# Altium PCB Connection_Test - Kopie.PcbDoc
Units mil, origin at the board's own origin, x right, y up, seen from the top; angles counter-clockwise.
Board outline 2960 x 2470 mil, 2 copper layers (Top Layer 1, Bottom Layer 1), stack 20.956 mil thick; 34 components, 216 nets, 180 pads, 636 vias.
Unrouted connection lines stored in the file: 245.
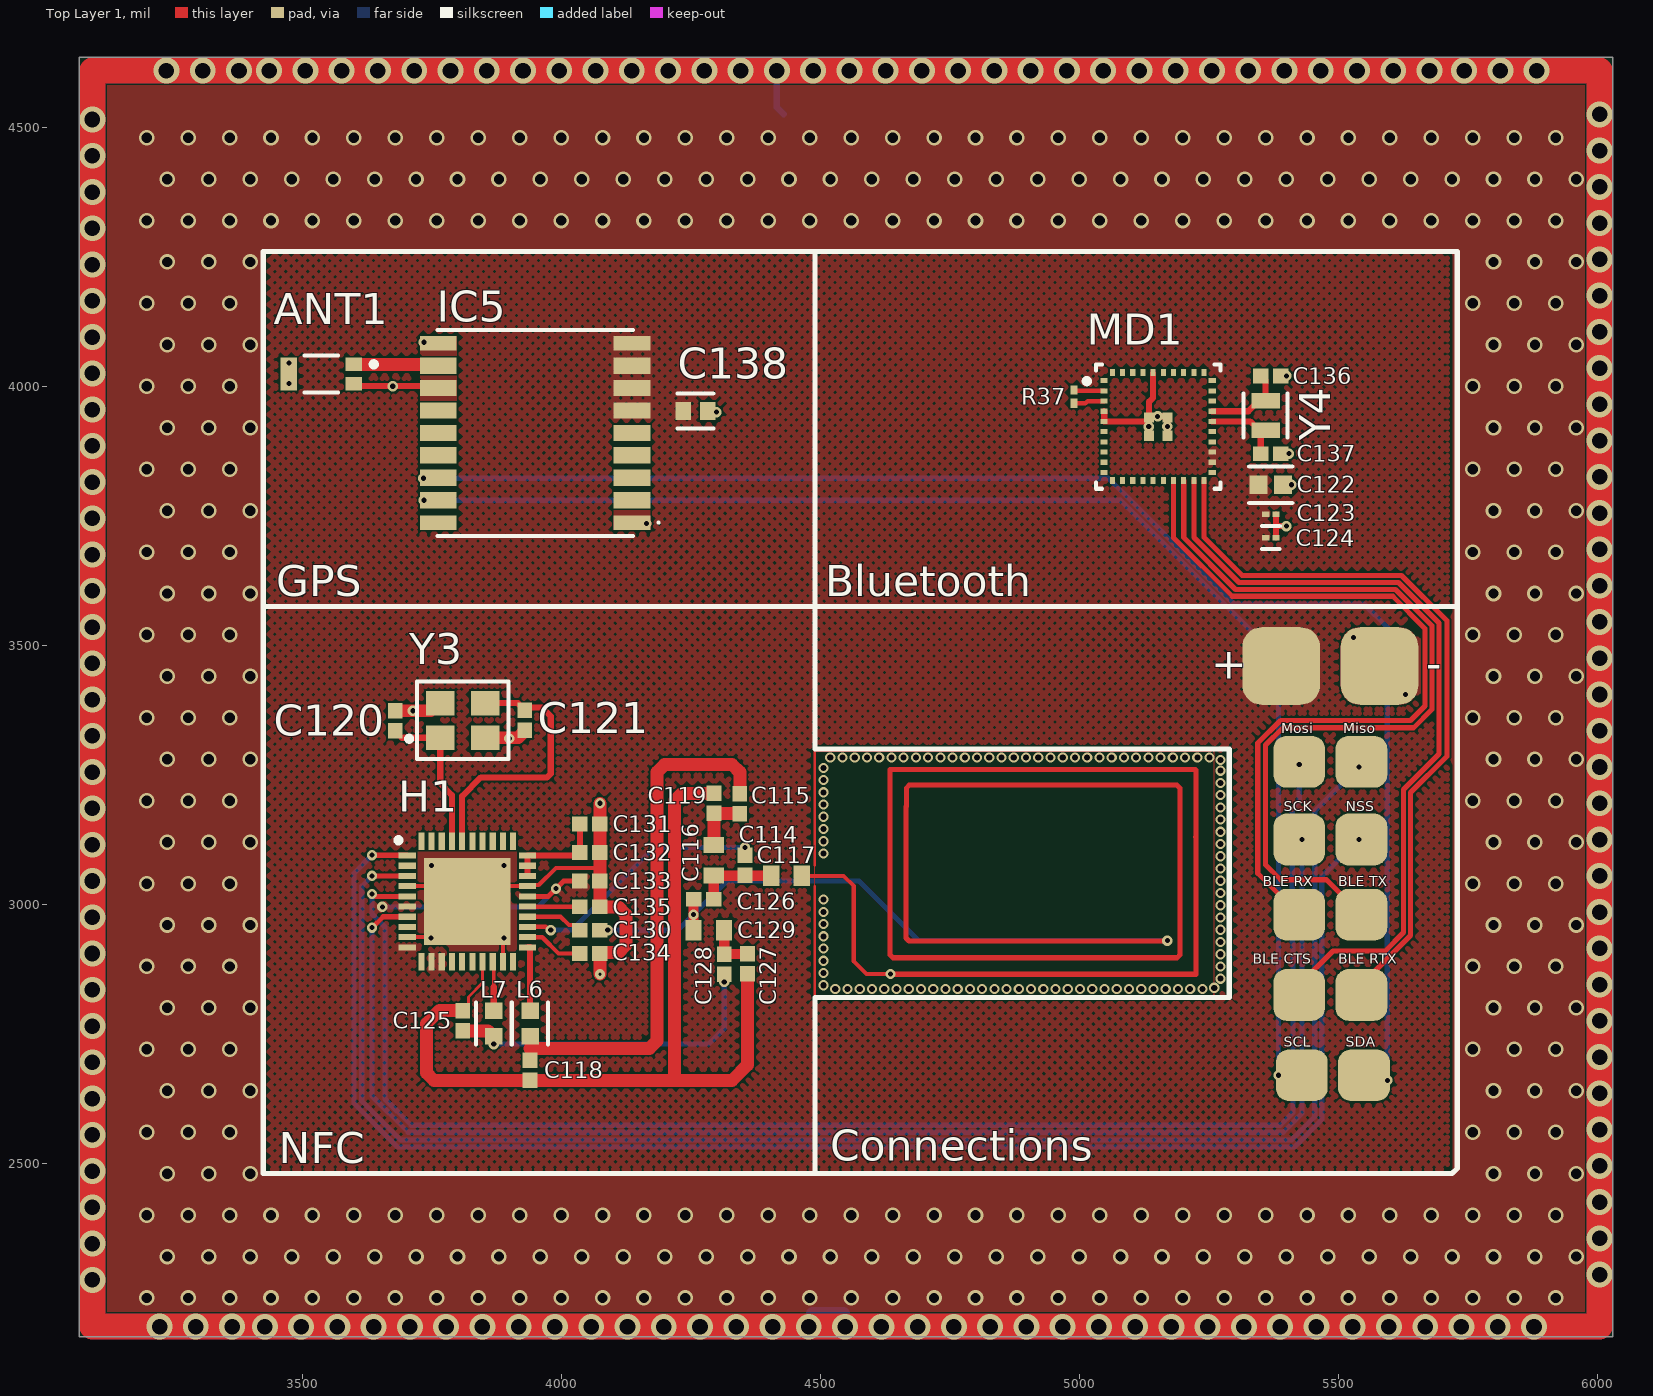
[diagram p0: Top Layer 1 view]
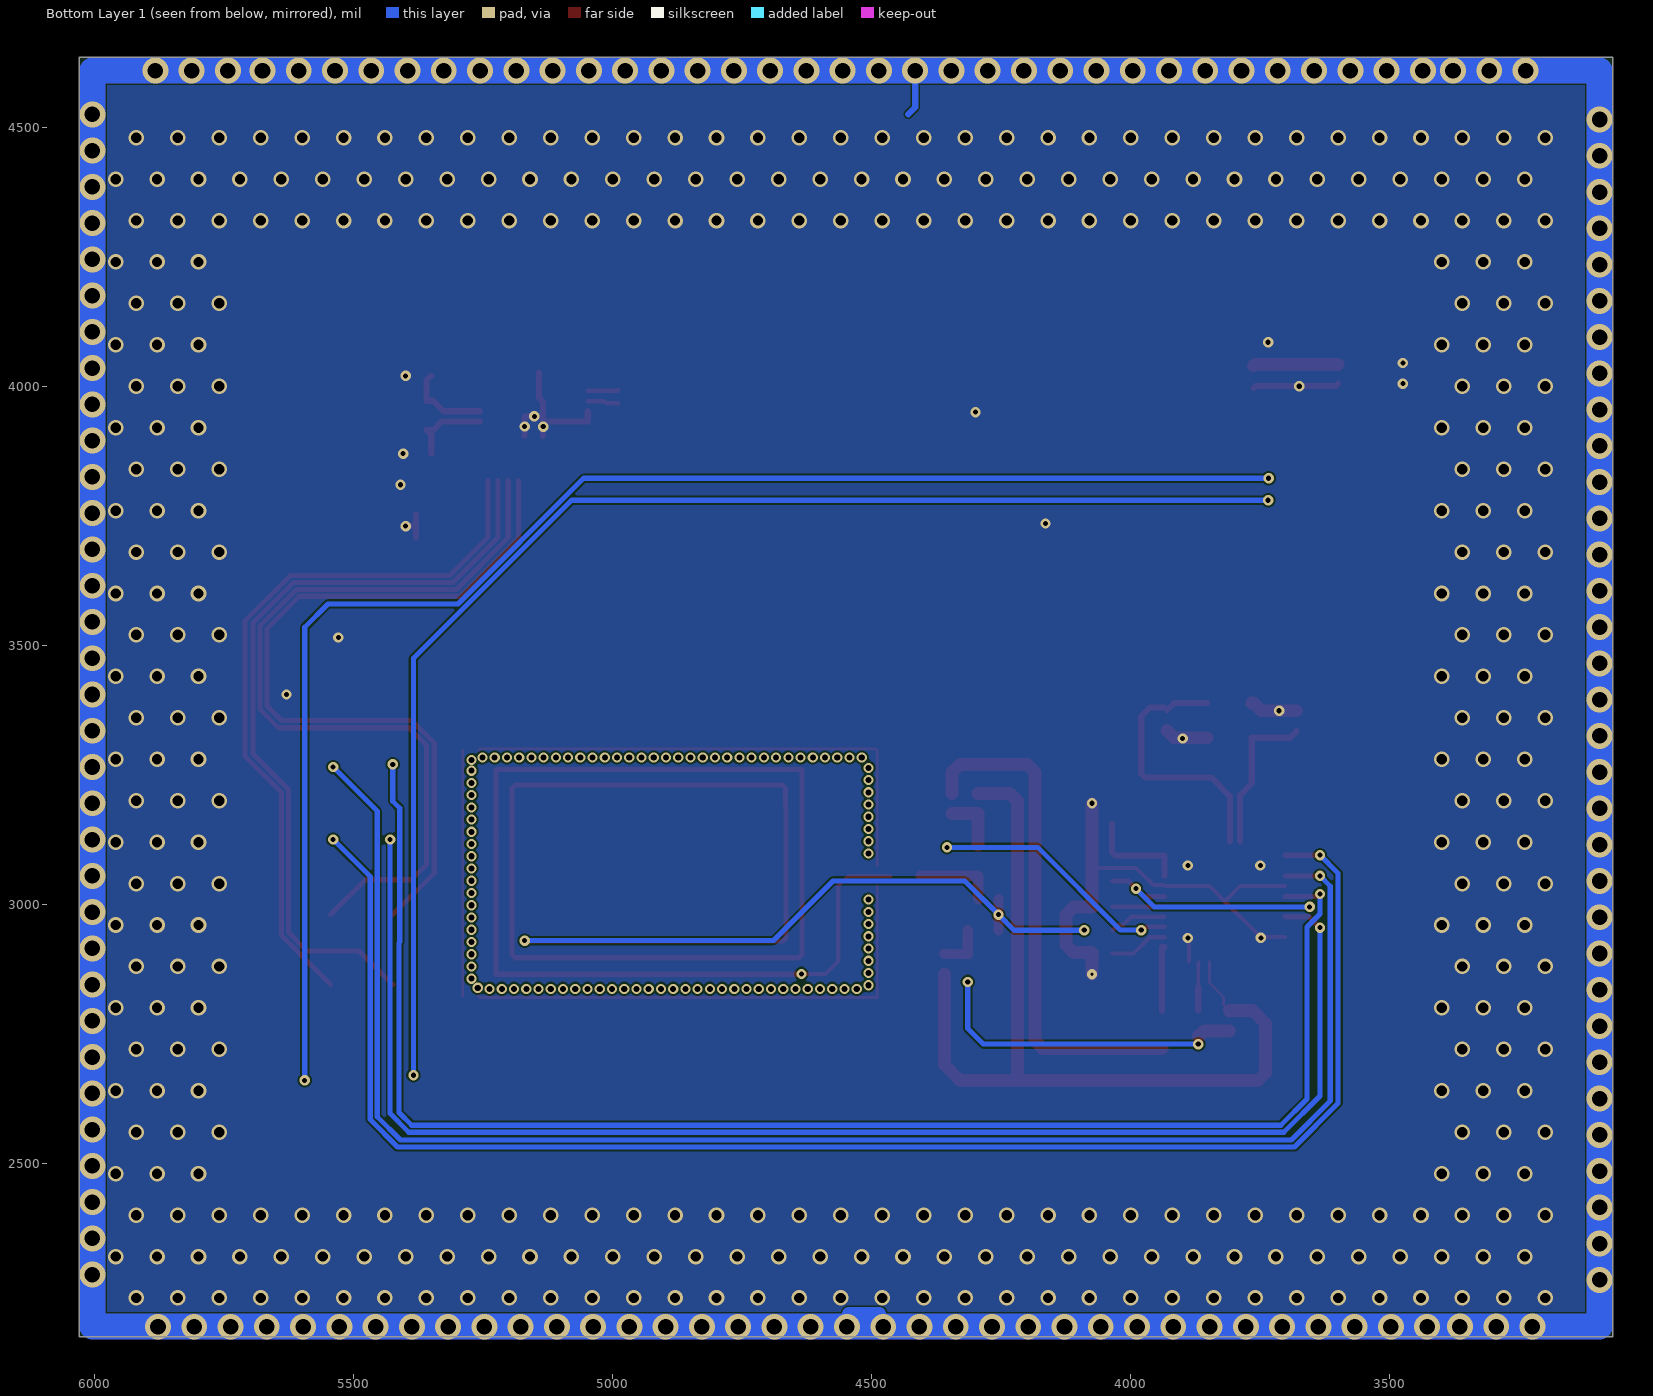
[diagram p1: Bottom Layer 1 view, seen from below]
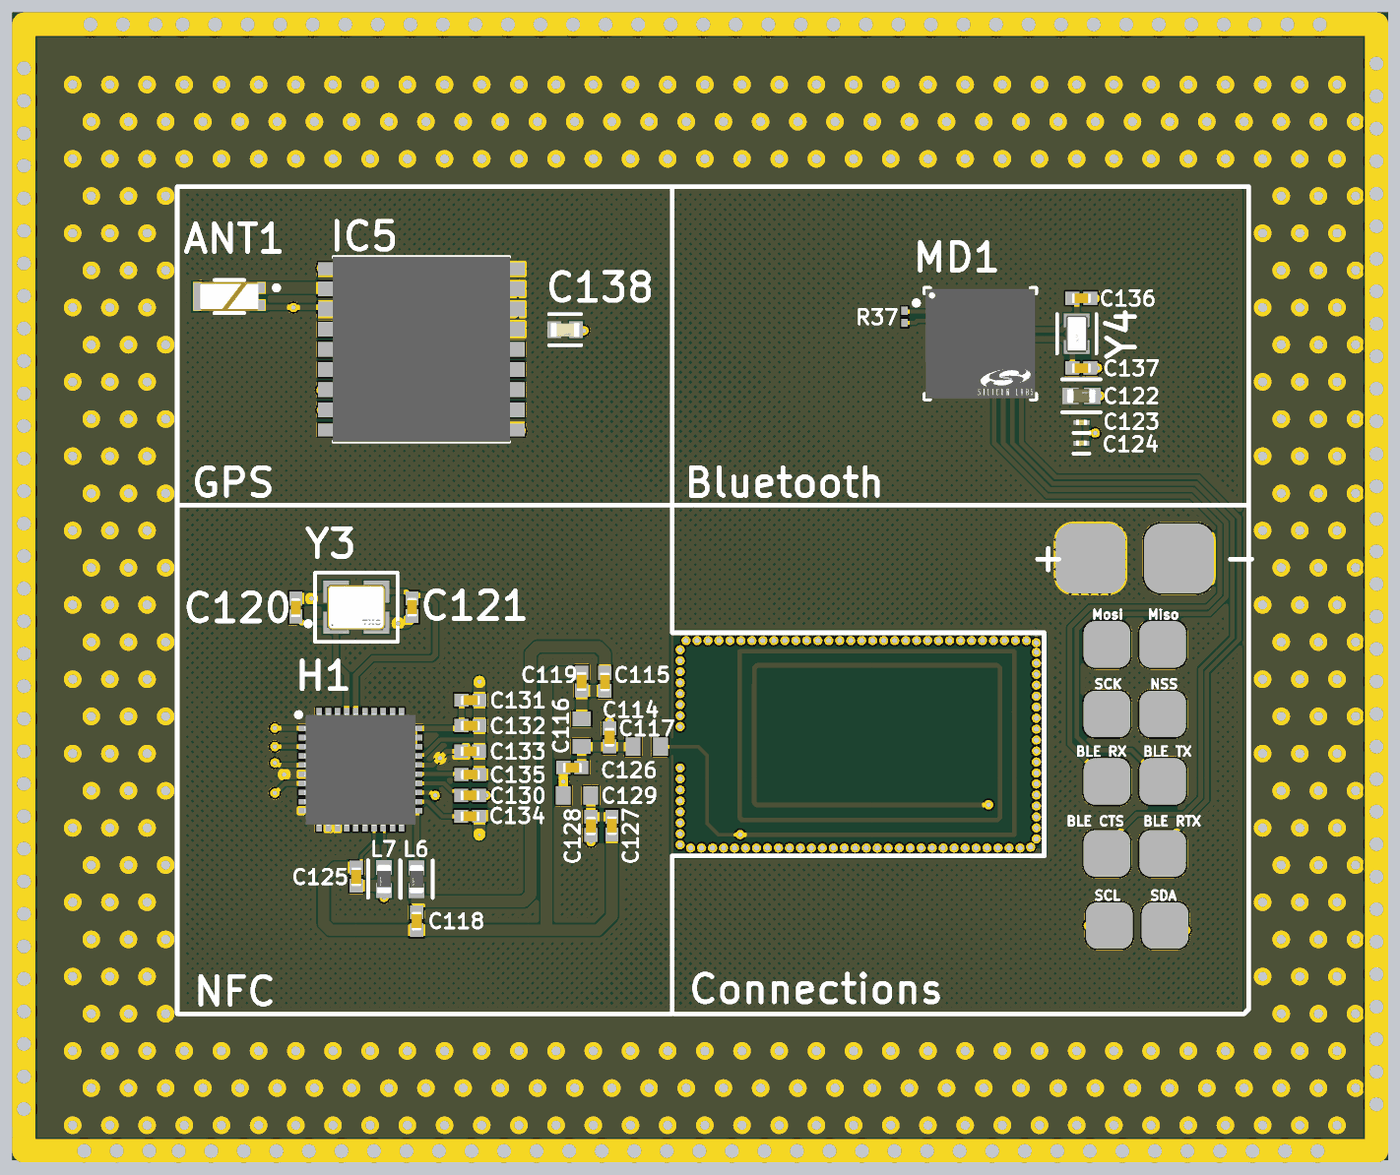
[diagram p2: 3D render of the assembled board from above, using the file's embedded part models]

## Layer stack, top to bottom
Top Solder: solder mask 0.4, Solder Resist, Dk 3.5
Top Layer 1: signal copper 1.378
Dielectric 2: prepreg 2.8, PP-006, Dk 4.1
Dielectric 1: dielectric 12.6, FR-4, Dk 4.8
Dielectric 3: prepreg 2.8, PP-006, Dk 4.1
Bottom Layer 1: signal copper 1.378
Bottom Solder: solder mask 0.4, Solder Resist, Dk 3.5

## Board outline
3070,2165 3070,4635 6030,4635 6030,2165

## Design rules (kind name [scope] priority, off if disabled: settings)
Clearance [All] p1: gap=3.5 ignorepadtopadclearanceinfootprint=FALSE
PlaneConnect [All] p1: planeconnectstyle=Direct reliefexpansion=20 reliefentries=4 reliefconductorwidth=10 reliefairgap=10
PolygonConnect [All] p1: connectstyle=Direct reliefconductorwidth=10 reliefentries=4 polygonreliefangle="90 Angle" airgapwidth=10
RoomDefinition 1_Airframe-Power_1 [InComponentClass('1_Airframe-Power_1')] p1: confinementstyle=ConfineIn formatcopy=TRUE lockcomponents=FALSE outline 0,0 2000,0 2000,1000 0,1000
RoutingVias [All] p1: holewidth=9.84 width=19.68 viastyle="Through Hole" minholewidth=7.87 minwidth=15.75 maxholewidth=28 maxwidth=50
SolderMaskExpansion [All] p1: expansion=4 istentingtop=FALSE
Width [All] p1: maxlimit=100 minlimit=3.5 preferedwidth=10
29 further rules are at their usual default settings.

## Components (designator, comment, footprint, x,y, rotation, side; value= is the part's Value field where it differs from the comment)
ANT1 "W3011A" FP-W3011A-MFG 3537.01,4023.7 r0 top
C114 "82pF 0402" CAPC1005X55X25ML5T10 4355,3075 r270 top
C115 "330pF 0402" CAPC1005X55X25ML5T10 4345,3194.29 r270 top
C116 "0.15Ohm 0402" RESC1608X55X25ML10T15 4295,3085 r90 top
C117 "470mOhm 0402" RESC1608X55X25ML10T15 4435,3055 r180 top
C118 "1.2nF 0402" CAPC1005X55X25ML5T10 3940,2679.29 r270 top
C119 "1nF 0402" CAPC1005X55X25ML5T10 4295,3195 r270 top
C120 "15pF 0402" CAPC1005X55X25ML5T10 3680,3354.29 r270 top
C121 "15pF 0402" CAPC1005X55X25ML5T10 3930,3355 r270 top
C122 "10uF 0603" FP-GRM188-0_2-IPC_C 5370,3810 r0 top
C123 "0.1uF 0201" FP-C0603-030-0_03-IPC_C 5370.3,3752.63 r0 top
C124 "0.1uF 0201" FP-C0603-030-0_03-IPC_C 5370.21,3707.92 r0 top
C125 "1.2nF 0402" CAPC1005X55X25ML5T10 3810,2775 r270 top
C126 "0.6pF 0402" CAPC1005X55X25ML5T10 4275,3010 r180 top
C127 "1nF 0402" CAPC1005X55X25ML5T10 4360,2885 r270 top
C128 "330pF 0402" CAPC1005X55X25ML5T10 4315,2884.29 r90 top
C129 "0.15Ohm 0402" RESC1608X55X25ML10T15 4285,2950 r0 top
C130 "82pF 0402" CAPC1005X55X25ML5T10 4055,2950 r180 top
C131 "2.2uF 0402" CAPC1005X55X25ML5T10 4055.71,3155 r0 top
C132 "1nF 0402" CAPC1005X55X25ML5T10 4055.71,3100 r0 top
C133 "1nF 0402" CAPC1005X55X25ML5T10 4055,3045 r0 top
C134 "6.8uF 0402" CAPC1005X55X25ML5T10 4055,2905 r0 top
C135 "10uF 0402" CAPC1005X55X25ML5T10 4055.71,2995 r0 top
C136 "15pF 0402" CAPC1005X55X25ML5T10 5370,4020 r180 top
C137 "15pF 0402" CAPC1005X55X25ML5T10 5370,3870 r180 top
C138 "0.1uF 0603" FP-C0603C-CF-MFG 4259.48,3952.33 r180 top value="0.10 μF"
H1 "PN5180A0HN_C1E" QFN50P600X600X100-41N-D 3818.86,3005.47 r0 top
IC5 "MAX-M10S-00B" MAXM10S00B 3950,3910 r0 top
L6 "100nH" FP-LQM18NN_00-IPC_C 3940,2769.64 r270 top
L7 "100nH" FP-LQM18NN_00-IPC_C 3870,2770 r270 top
MD1 "BGM220SC12WGA2" FP-BGM220SC12WGA2-MFG 5152.72,3922.28 r0 top
R37 "0R 0201" RESC0603X28X15NL05T05 4990,3980 r270 top
Y3 "7M-27.120MEEQ-T" FP-7M-MFG 3810,3355 r0 top
Y4 "ABS06-32.768KHZ-9-T" FP-ABS06-MFG 5360,3943.54 r90 top

## Footprints (in the part's own frame and the unit in brackets; to place one, negate y for a bottom-side part, rotate by r counter-clockwise, add the part's x,y. Pads: shape width x height; smd on the part's side, far side on the other; paste and mask are expansions set on the pad)
CAPC1005X55X25ML5T10 [mm] "Chip Capacitor, 2-Leads, Body 1.05x0.55mm, IPC Low Density"
  rect 0.76x0.72 smd: 1(-0.49,0) 2(0.49,0)
  body extent -0.53,-0.28 0.53,0.28, height 0.55
FP-7M-MFG [mm]
  rect 1.4x1.2 smd paste+0 mask+0: 1(-1.1,-0.85) 2(1.1,-0.85) 3(1.1,0.85) 4(-1.1,0.85)
  silkscreen extent -2.75,-1.9 2.25,1.9, body extent -1.9,-1.55 1.9,1.55, height 0.25
FP-ABS06-MFG [mm]
  rect 0.75x1.4 smd paste+0 mask+0: 1(-0.725,0) 2(0.725,0)
  silkscreen extent -1.07,-1.07 1.07,1.07, body extent -1.2,-0.8 1.2,0.8, height 0.25
FP-BGM220SC12WGA2-MFG [mm]
  rect 0.35x0.25 smd paste-1000 mask+0: 1(-2.65,2.25) 2(-2.65,1.75) 3(-2.65,1.25) 4(-2.65,0.75) 5(-2.65,0.25) 6(-2.65,-0.25) 7(-2.65,-0.75) 8(-2.65,-1.25) 9(-2.65,-1.75) 10(-2.65,-2.25) 21(2.65,-2.25) 22(2.65,-1.75) 23(2.65,-1.25) 24(2.65,-0.75) 25(2.65,-0.25) 26(2.65,0.25) 27(2.65,0.75) 28(2.65,1.25) 29(2.65,1.75) 30(2.65,2.25)
  rect 0.25x0.35 smd paste-1000 mask+0: 11(-2.25,-2.65) 12(-1.75,-2.65) 13(-1.25,-2.65) 14(-0.75,-2.65) 15(-0.25,-2.65) 16(0.25,-2.65) 17(0.75,-2.65) 18(1.25,-2.65) 19(1.75,-2.65) 20(2.25,-2.65) 31(2.25,2.65) 32(1.75,2.65) 33(1.25,2.65) 34(0.75,2.65) 35(0.25,2.65) 36(-0.25,2.65) 37(-0.75,2.65) 38(-1.25,2.65) 39(-1.75,2.65) 40(-2.25,2.65)
  rect 0.5x0.5 smd paste-1000 mask+0: 41(-0.45,0.45) 42(-0.45,-0.45) 43(0.45,-0.45) 44(0.45,0.45)
  silkscreen extent -3.62,-3.05 3.05,3.05, body extent -3.15,-3.15 3.15,3.15, height 0.25
FP-C0603-030-0_03-IPC_C [mil]
  rect 14.03x10.34 smd paste+0 mask+0: 1(-9.97,0) 2(9.97,0)
  silkscreen extent -17,-22 17,22, body extent -21,-10 21,10, height 10
FP-C0603C-CF-MFG [mm]
  rect 0.75x0.9 smd paste+0 mask+0: 1(-0.6,0) 2(0.6,0)
  silkscreen extent -0.87,-0.85 0.88,0.85, body extent -1.2,-0.6 1.2,0.6, height 0.25
FP-GRM188-0_2-IPC_C [mil]
  rect 35.63x35.68 smd paste+0 mask+0: 1(-23.64,0) 2(23.64,0)
  silkscreen extent -41,-35 41,35, body extent -45,-24 45,24, height 10
FP-LQM18NN_00-IPC_C [mil]
  rect 31.75x33.79 smd paste+0 mask+0: 1(-24.64,0) 2(24.64,0)
  silkscreen extent -41,-34 41,34, body extent -44,-23 44,23, height 10
FP-W3011A-MFG [mm]
  rect 0.8x0.65 smd paste-1000 mask+0: 1(1.6,0.475) 2(1.6,-0.475)
  rect 0.8x1.6 smd paste-1000 mask+0: 3(-1.6,0)
  silkscreen extent -0.82,-0.9 2.7,0.9, body extent -2.1,-1 2.1,1, height 0.25
MAXM10S00B [mm]
  rect 1.8x0.7 smd: 1(4.75,-4.4) 9(4.75,4.4) 10(-4.75,4.4) 18(-4.75,-4.4)
  rect 1.8x0.8 smd: 2(4.75,-3.3) 3(4.75,-2.2) 4(4.75,-1.1) 5(4.75,0) 6(4.75,1.1) 7(4.75,2.2) 8(4.75,3.3) 11(-4.75,3.3) 12(-4.75,2.2) 13(-4.75,1.1) 14(-4.75,0) 15(-4.75,-1.1) 16(-4.75,-2.2) 17(-4.75,-3.3)
  silkscreen extent -4.8,-5.05 6.1,5.05, body extent -4.85,-5.05 4.85,5.05, height 2.8
QFN50P600X600X100-41N-D [mm]
  rect 0.85x0.3 smd: 1(-2.95,2.25) 2(-2.95,1.75) 3(-2.95,1.25) 4(-2.95,0.75) 5(-2.95,0.25) 6(-2.95,-0.25) 7(-2.95,-0.75) 8(-2.95,-1.25) 9(-2.95,-1.75) 10(-2.95,-2.25) 21(2.95,-2.25) 22(2.95,-1.75) 23(2.95,-1.25) 24(2.95,-0.75) 25(2.95,-0.25) 26(2.95,0.25) 27(2.95,0.75) 28(2.95,1.25) 29(2.95,1.75) 30(2.95,2.25)
  rect 0.3x0.85 smd: 11(-2.25,-2.95) 12(-1.75,-2.95) 13(-1.25,-2.95) 14(-0.75,-2.95) 15(-0.25,-2.95) 16(0.25,-2.95) 17(0.75,-2.95) 18(1.25,-2.95) 19(1.75,-2.95) 20(2.25,-2.95) 31(2.25,2.95) 32(1.75,2.95) 33(1.25,2.95) 34(0.75,2.95) 35(0.25,2.95) 36(-0.25,2.95) 37(-0.75,2.95) 38(-1.25,2.95) 39(-1.75,2.95) 40(-2.25,2.95)
  rect 4.25x4.25 smd: 41(0,0)
  silkscreen extent -3.5,2.88 -3.25,3.12, body extent -3.05,-3.05 3.05,3.05, height 1
RESC0603X28X15NL05T05 [mm] "Chip Resistor, 2-Leads, Body 0.60x0.30mm, IPC Medium Density"
  rect 0.45x0.35 smd: 1(-0.325,0) 2(0.325,0)
  body extent -0.33,-0.17 0.33,0.18, height 0.28
RESC1608X55X25ML10T15 [mm] "Chip Resistor, 2-Leads, Body 1.60x0.80mm, IPC Low Density"
  rect 0.8x1 smd: 1(-0.75,0) 2(0.75,0)
  body extent -0.85,-0.45 0.85,0.45, height 0.55

## Part data
ANT1: library part CMP-16379-000002-1, "RF ANT 1.575GHZ CHIP SOLDER SMD", Manufacturer="PulseLarsen Antennas", Max Frequency=1606.6MHz, Power Rating=2W, Temperature="-40°C to +85°C", Temperature Range High=+85°C, Temperature Range Low=-40°C, Automotive=No, Bandwidth=1559-1606.6MHz, Category=Ant, ComponentLink2Description=Datasheet, ComponentLink2URL=https://www.pulseelectronics.com/docs/library/W3011.pdf, Device Class L1="Integrated Circuits (ICs)", Device Class L2="RF Semiconductors and Devices", Device Class L3="RF Antennas", Digikey Description="RF ANT 1.575GHZ CHIP SOLDER SMD", Gain=1.8dB, Height=1.3mm, Impedance=50Ω, Lead Free=Yes, Manufacturer Part Number=W3011A, Number Of Bands=1, Octopart=https://octopart.com/w3011a-pulse-10684180, Package=W3011A, Return Loss=-6/-7/-10dB, RoHS=TRUE
C114 C115 C118 C119 C120 C121 C125 C126 C127 C128 C130 C131 C132 C133 C134 C135 C136 C137: library part CMP-1662-00017-1, "Chip Capacitor, 1 nF, +/- 10%, 50 V, -55 to 125 degC, 0402 (1005 Metric), RoHS, Tape and Reel", Capacitance="1 nF", Case Code (Imperial)=0402, Case Code (Metric)=1005, Max Operating Temperature="125 degC", Min Operating Temperature="-55 degC", Package Quantity=10000, Tolerance=10%, Type (Capacitors)=X7R, Voltage Rating="50 V", Case\/Package=0402, ComponentLink1Description="Manufacturer URL", ComponentLink1URL=http://www.murata.com/, ComponentLink2Description=Datasheet, ComponentLink2URL=http://psearch.en.murata.com/capacitor/product/GRM155R71H102KA01%23.pdf, DatasheetVersion=07/2016, Height="0.5 mm", Length="1 mm", Mount="Surface Mount", Mounting Technology="Surface Mount", PackageDescription="2-Pin Surface Mount Device, Body 1 x 0.5 mm", PackageReference=0402, Packaging="Tape and Reel", Pins=2, Radiation Hardening=No, REACH SVHC="No SVHC", RoHSCompliant=true, Voltage Rating (DC)="50 V", Width="0.5 mm"
C116 C117 C129: library part CMP-2100-03667-1, "Chip Resistor, 0 Ohm, +/- 5%, 0.1 W, -55 to 155 degC, 0603 (1608 Metric), RoHS, Tape and Reel", Case Code (Imperial)=0603, Case Code (Metric)=1608, Manufacturer=Yageo, Max Operating Temperature=155degC, Min Operating Temperature=-55degC, Package Description="2-Pin Surface Mount Device, Body 1.6 x 0.8 mm", Package Quantity=5000, Power Rating=100mW, Resistance=0mOhm, Temperature Coefficient=200ppm/degreesC, Tolerance=5%, Voltage Rating=50V, Case/Package=0603, Composition=ThickFilm, Contact Plating=Tin, Datasheet URL=http://www.yageo.com/NewPortal/yageodocoutput?fileName=/pdf/R-Chip/PYu-RC_Group_51_RoHS_L_5.pdf, Datasheet Version="Rev. 5, 10/2016", Depth=0.8mm, Height=0.45mm, Lead Free=LeadFree, Length=1.6mm, Manufacturer URL=http://www.yageo.com/, Military Standard=Not, Number of Pins=2, Package Reference=0603, Packaging=TapeandReel, Radiation Hardening=No, REACH SVHC=NoSVHC, RoHSCompliant=true, Termination=SMD/SMT, Voltage Rating (DC)=50V, Width=0.8mm
C122: library part CMP-2000-06337-3, "Chip Multilayer Ceramic Capacitors for General Purpose, 0603, 22uF, X5R, 15%, 20%, 10V", Capacitance=22uF, Case Code (Imperial)=0603, Case Code (Metric)=1608, Dielectric=X5R, Max Operating Temperature=85°C, Min Operating Temperature=-55°C, Package Quantity=4000, Tolerance=20%, Voltage Rating=10V, Case/Package=0603, Depth=0.8mm, Height=0.8mm, Lead Free="Lead Free", Length=1.6mm, Material=Ceramic, Mount="Surface Mount", Packaging="Tape and Reel", REACH SVHC="No SVHC", Termination=SMD/SMT, Thickness=0.039inch, Voltage Rating (DC)=10V, Weight=0.000222oz, Width=0.8mm
C123 C124: library part CMP-08246-007095-1, "Multilayer Ceramic Capacitors 220nF ±10% 6.3V X6S SMD 0201", Capacitance=220nF, Case Code (Imperial)=0201, Case Code (Metric)=0603, Dielectric=X6S, Dielectric Material=Ceramic, Max Operating Temperature=105°C, Min Operating Temperature=-55°C, Package Quantity=1, Tolerance=10%, Voltage Rating=6.3V, Case/Package=0201, Construction=Flat, Depth=0.3mm, Height=0.3mm, Lead Free="Lead Free", Length=0.6mm, Mount="Surface Mount", Packaging="Cut Tape", REACH SVHC="No SVHC", Resistor Type=Ceramic, RoHS Compliant=Yes, Series=C, Termination=SMD/SMT, Thickness=300um, Voltage Rating (DC)=6.3V, Weight=6E-06oz, Width=0.012inch
C138: library part CMP-2006-03061-2, "CAP CER 0.1UF 50V X7R 0603", Capacitance="0.10 μF", Manufacturer=KEMET, Manufacturer Part Number=C0603C104K5RACTU, Package=C0603C-CF, Temperature="-55°C to +125°C", Temperature Characteristic=X7R, Temperature Coefficient=30ppm/°C, Temperature Range High=+125°C, Temperature Range Low=-55°C, Tolerance=0.1, Voltage Rating="50 V", Automotive=Yes, Automotive Grade="Grade 1", Category=Cap, ComponentLink2Description=Datasheet, ComponentLink2URL=https://api.kemet.com/component-edge/download/datasheet/C0603C100J5GACAUTO.pdf, Device Class L1="Passive Components", Device Class L2=Capacitors, Device Class L3="Ceramic Capacitors", Digikey Description="CAP CER 0.1UF 50V X7R 0603", Height=0.87mm, Lead Free=Yes, Material=Ceramic, Octopart=https://octopart.com/c0603c104k5ractu-kemet-139244, RoHS=TRUE
H1: "Hardware", Arrow Part Number=PN5180A0HN/C1E, Manufacturer_Name=NXP, Mouser Part Number=771-PN5180A0HN/C1E, Arrow Price/Stock=https://www.arrow.com/en/products/pn5180a0hnc1e/nxp-semiconductors?region=nac, Datasheet Link=https://datasheet.datasheetarchive.com/originals/distributors/DKDS42/DSANUWW0047957.pdf, Height=1mm, Manufacturer_Part_Number=PN5180A0HN/C1E, Mouser Price/Stock=https://www.mouser.co.uk/ProductDetail/NXP-Semiconductors/PN5180A0HN-C1E?qs=ycOx5YLpuFVFXy2iTiMBHA%3D%3D
IC5: "Integrated Circuit", Manufacturer_Name=U-Blox, Mouser Part Number=377-MAX-M10S-00B, Datasheet Link=https://content.u-blox.com/sites/default/files/MAX-M10S_IntegrationManual_UBX-20053088.pdf, Height=2.7mm, Manufacturer_Part_Number=MAX-M10S-00B, Mouser Price/Stock=https://www.mouser.co.uk/ProductDetail/u-blox/MAX-M10S-00B?qs=A6eO%252BMLsxmT0PfQYPb7LLQ%3D%3D
L6 L7: library part CMP-06042-014173-1, "Multilayer Type Inductor for General Circuits, 0603 (1608), 100nH, 10%, 0.5Ω, 50mA", Case Code (Imperial)=0603, Case Code (Metric)=1608, Current Rating=50mA, DC Resistance (DCR)=500mR, Inductance Tolerance=10%, Max Operating Temperature=85°C, Min Operating Temperature=-40°C, Package Quantity=4000, Self Resonant Frequency=240MHz, Test Frequency=25MHz, Case/Package=0603, Core Material=Ferrite, DC Current=50mA, Depth=0.95mm, Height=0.8mm, Height - Seated (Max)=0.035inch, Inductance=100nH, Lead Free="Lead Free", Length=1.6mm, Max DC Current=50mA, Military Standard=Not, Mount="Surface Mount", Number of Pins=2, Packaging="Tape and Reel", Q Factor=15, Radiation Hardening=No, REACH SVHC="No SVHC", Resistance=500mR, Shielding=Shielded, Termination=SMD/SMT, Tolerance=10%, Width=0.031inch
MD1: library part CMP-08140-000024-1, "WIRELESS GECKO, BLUETOOTH SIP MO"
R37: library part CMP-2004-00006-1, Manufacturer=Vishay, Part Number=CRCW0201100RFNED
Y3: library part CMP-2000-05695-2, "Crystal 27.12MHz, 10ppm, 10pF, 50Ω", Case/Package=SMD/SMT, ESR (Equivalent Series Resistance)=60R, Frequency=27.12MHz, Frequency Stability=10ppm, Load Capacitance=10pF, Max Operating Temperature=70°C, Min Operating Temperature=-10°C, Package Quantity=3000, Depth=2.5mm, Frequency Tolerance=10ppm, Height=0.031inch, Lead Free="Lead Free", Length=3.2mm, Mount="Surface Mount", Packaging="Tape and Reel", REACH SVHC="No SVHC", Series=7M, Termination=SMD/SMT, Tolerance=10ppm, Width=2.5mm
Y4: library part CMP-27762-015421-1, "Crystal 32.768kHz ±20ppm (Tol) 9pF FUND 90kΩ 2-Pin Mini-CSMD T/R", Case/Package=CSMD, ESR (Equivalent Series Resistance)=90kR, Frequency=32.768kHz, Frequency Tolerance=20ppm, Load Capacitance=9pF, Max Operating Temperature=85°C, Min Operating Temperature=-40°C, Package Quantity=3000, Depth=1.2mm, Height=0.6mm, Lead Free="Lead Free", Length=2mm, Mount="Surface Mount", Number of Pins=2, Packaging="Tape and Reel", RoHS Compliant=Yes, Series=ABS06, Termination=SMD/SMT, Tolerance=20ppm, Width=1.2mm

## Free pads (board coordinates)
  rrect50% 150x150 smd: 5(5390,3460) 5(5580,3460)
  rrect50% 100x100 smd: 5(5425,2825) 5(5425,2980) 5(5425,3125) 5(5425,3275) 5(5430,2670) 5(5545,2825) 5(5545,2980) 5(5545,3125) 5(5545,3275) 5(5550,2670)

## Via types
v1: diameter 30, hole 20, Top Layer 1 to Bottom Layer 1, 348 vias
v2: diameter 50, hole 30, Top Layer 1 to Bottom Layer 1, 144 vias
v3: diameter 19.68, hole 11.81, Top Layer 1 to Bottom Layer 1, 99 vias
v4: diameter 20, hole 9.84, Top Layer 1 to Bottom Layer 1, 44 vias
v5: diameter 20, hole 6, Top Layer 1 to Bottom Layer 1, 1 vias

## Nets (pads, with @x,y where several pads share a name; then routed paths per layer and width w, separated by ;. In a path a pad name is that pad's centre, name@x,y a point inside that pad or via, vN(x,y) a via of type N, cw(c..) or ccw(c..) an arc to the next point about the centre after c; other vN are vias at no path point)
+0V6: 
+0V9: 
+0V675: 
+1V0: 
+1V2: 
+1V8: 
+2V4: 
+VS: C122.1 C123.1 C124.1 C133.1 C138.2 H1.6 H1.10 H1.12 H1.13 H1.26 IC5.6 IC5.7 IC5.8 IC5.9 MD1.22 MD1.23 pad.5@5390,3460 | length 462.7
  Top Layer 1 w10: H1.26 3975.31,3015.31 v4(3990.16,3030.16) 4005,3045 C133.1
  Bottom Layer 1 w10: v4(3655,2995) 3955,2995 v4(3990.16,3030.16)
AC1: 
AC2: 
ANT1: C114.1 H1.23 | length 488.9
  Top Layer 1 w8.59: H1.23 3970.65,2956.26 3976.91,2950 v4(3980,2950)
  Bottom Layer 1 w9.8: v4(3980,2950) 4020,2950 4180,3110 v4(4355,3110)
ANT2: C130.2 H1.24 | length 110.7
  Top Layer 1 w8: H1.24 3999.06,2975.94 4015.3,2959.7 4025.22,2959.7 C130.2@4034.92,2950
"ANT IN": MD1.3 R37.2 | length 60.2
  Top Layer 1 w8.59: R37.2 5012.2,3967.2 5016.5,3971.5 MD1.3
"ANT Point": MD1.40
Bat_Charge: 
Batt+: 
Batt-: 
"BLE CTS": MD1.19 pad.5@5425,2825 | length 1520.5
  Top Layer 1 w10: MD1.19 5221.61,3708.39 5308.5,3621.5 5616.68,3621.5 5695,3543.18 5695,3290 5626.5,3221.5 5626.5,2945.59 5590.91,2910 5490,2910 pad.5@5425,2845
"BLE Reset": MD1.35
"BLE RTS": MD1.20 pad.5@5545,2825 | length 1415.4
  Top Layer 1 w10: MD1.20 5241.3,3708.7 5315,3635 5622.28,3635 5710,3547.28 5710,3285.91 5640,3215.91 5640,2940 pad.5@5545,2845
"BLE RX": MD1.17 pad.5@5425,2980 | length 1535
  Top Layer 1 w10: MD1.17 5182.24,3707.76 5295.5,3594.5 5605.5,3594.5 5668,3532 5668,3383 5640,3355 5388.53,3355 5345,3311.47 5345,3060 pad.5@5425,2980
"BLE TX": MD1.18 pad.5@5545,2980 | length 1627.1
  Top Layer 1 w10: MD1.18 5201.93,3708.07 5302,3608 5611.09,3608 5681.5,3537.59 5681.5,3376.5 5645.86,3340.86 5393.49,3340.86 5360,3307.38 5360,3076.5 5389.22,3047.28 5477.72,3047.28 pad.5@5545,2980
BT_Sense1: 
BT_Sense2: 
BT_Sense3: 
CHG: 
CLK: 
Controll_Batterie_Charge: 
"CTR Int": 
"CTR Reset": 
"CTR SCL": 
"CTR SDA": 
D+: 
D-: 
"DDR4 A0": 
"DDR4 A1": 
"DDR4 A2": 
"DDR4 A3": 
"DDR4 A4": 
"DDR4 A5": 
"DDR4 A6": 
"DDR4 A7": 
"DDR4 A8": 
"DDR4 A9": 
"DDR4 A10": 
"DDR4 A11": 
"DDR4 A12": 
"DDR4 A13": 
"DDR4 ACT_N": 
"DDR4 BA0": 
"DDR4 BA1": 
"DDR4 BG0": 
"DDR4 CAS#": 
"DDR4 CK": 
"DDR4 CK#": 
"DDR4 CS#": 
"DDR4 DM0": 
"DDR4 DM1": 
"DDR4 DQ0": 
"DDR4 DQ1": 
"DDR4 DQ2": 
"DDR4 DQ3": 
"DDR4 DQ4": 
"DDR4 DQ5": 
"DDR4 DQ6": 
"DDR4 DQ7": 
"DDR4 DQ8": 
"DDR4 DQ9": 
"DDR4 DQ10": 
"DDR4 DQ11": 
"DDR4 DQ12": 
"DDR4 DQ13": 
"DDR4 DQ14": 
"DDR4 DQ15": 
"DDR4 DQS0": 
"DDR4 DQS0#": 
"DDR4 DQS1": 
"DDR4 DQS1#": 
"DDR4 ODT": 
"DDR4 RAS#": 
"DDR4 Reset": 
"DDR4 WE#": 
"Display CSX": 
"Display Reset": 
"Display RS": 
"Display SCL": 
"Display SDI": 
"Display SDO": 
ECG-Out: 
FOD: 
GND: ANT1.2 ANT1.3 C120.1 C121.2 C122.2 C123.2 C124.2 C131.2 C132.2 C133.2 C134.2 C135.2 C136.1 C137.1 C138.1 H1.4 H1.9 H1.19 H1.27 H1.41 IC5.1 IC5.10 IC5.12 MD1.4 MD1.5 MD1.36 MD1.41 MD1.42 MD1.43 MD1.44 pad.5@5580,3460 Y3.2 Y3.4 | length 1726.5
  Top Layer 1 w8: H1.9 3749.96,2936.57 H1.41 ; H1.4 3789.33,3035 H1.41 ; H1.19 3887.76,2932.76 v4(3890,2935) ; 4075,3070 3990,3070 3956.91,3036.91 3936.91,3036.91 H1.27 3848.39,3035 H1.41
  Top Layer 1 w12: ANT1.2 3604.19,4000.81 3758.8,4000.81 IC5.12 ; MD1.4 MD1.5 5132.87,3932.13 v4@5135,3930 ; MD1.42 v4@5135,3930 ; MD1.36 5142.87,3977.87 5135,3970 MD1.41@5135,3941.97 ; MD1.43 MD1.44 5168.46,3941.97 MD1.41@5135,3941.97 ; C124.2 5380.23,3707.97 5380.23,3730.28 ; C123.2 5380.23,3752.58 5380.23,3730.28 ; v4(5400,3730) 5399.72,3730.28 5380.23,3730.28 ; v4@5135,3930 MD1.41 MD1.41@5135,3941.97
  Top Layer 1 w25: C120.1 3747.87,3373.58 3762.76,3388.46 Y3.4 ; Y3.2 3916.61,3321.54 3930,3334.92 C121.2 ; v5(4075,2865) 4075,2904.29 C134.2 4075.96,2906.67 4110.36,2906.67 4125,2921.32 4125,2980.36 4110.36,2995 C135.2 4075,3070 C132.2 v4(4075,3195)
  other v1: 3200,2240 3280,2240 3360,2240 3440,2240 3520,2240 3600,2240 3680,2240 3760,2240 3840,2240 3920,2240 4000,2240 4080,2240 4160,2240 4240,2240 4320,2240 4400,2240 4480,2240 4560,2240 4640,2240 4720,2240 4800,2240 4880,2240 4960,2240 5040,2240 5120,2240 5200,2240 5280,2240 5360,2240 5440,2240 5520,2240 5600,2240 5680,2240 5760,2240 5840,2240 5920,2240 3240,2320 3320,2320 3400,2320 3480,2320 3560,2320 3640,2320 3720,2320 3800,2320 3880,2320 3960,2320 4040,2320 4120,2320 4200,2320 4280,2320 4360,2320 4440,2320 4520,2320 4600,2320 4680,2320 4760,2320 4840,2320 4920,2320 5000,2320 5080,2320 5160,2320 5240,2320 5320,2320 5400,2320 5480,2320 5560,2320 5640,2320 5720,2320 5800,2320 5880,2320 5960,2320 3200,2400 3280,2400 3360,2400 3440,2400 3520,2400 3600,2400 3680,2400 3760,2400 3840,2400 3920,2400 4000,2400 4080,2400 4160,2400 4240,2400 4320,2400 4400,2400 4480,2400 4560,2400 4640,2400 4720,2400 4800,2400 4880,2400 4960,2400 5040,2400 5120,2400 5200,2400 5280,2400 5360,2400 5440,2400 5520,2400 5600,2400 5680,2400 5760,2400 5840,2400 5920,2400 3240,2480 3320,2480 3400,2480 5800,2480 5880,2480 5960,2480 3200,2560 3280,2560 3360,2560 5760,2560 5840,2560 5920,2560 3240,2640 3320,2640 3400,2640 5800,2640 5880,2640 5960,2640 3200,2720 3280,2720 3360,2720 5760,2720 5840,2720 5920,2720 3240,2800 3320,2800 3400,2800 5800,2800 5880,2800 5960,2800 3200,2880 3280,2880 3360,2880 5760,2880 5840,2880 5920,2880 3240,2960 3320,2960 3400,2960 5800,2960 5880,2960 5960,2960 3200,3040 3280,3040 3360,3040 5760,3040 5840,3040 5920,3040 3240,3120 3320,3120 3400,3120 5800,3120 5880,3120 5960,3120 3200,3200 3280,3200 3360,3200 5760,3200 5840,3200 5920,3200 3240,3280 3320,3280 3400,3280 5800,3280 5880,3280 5960,3280 3200,3360 3280,3360 3360,3360 5760,3360 5840,3360 5920,3360 3240,3440 3320,3440 3400,3440 5800,3440 5880,3440 5960,3440 3200,3520 3280,3520 3360,3520 5760,3520 5840,3520 5920,3520 3240,3600 3320,3600 3400,3600 5800,3600 5880,3600 5960,3600 3200,3680 3280,3680 3360,3680 5760,3680 5840,3680 5920,3680 3240,3760 3320,3760 3400,3760 5800,3760 5880,3760 5960,3760 3200,3840 3280,3840 3360,3840 5760,3840 5840,3840 5920,3840 3240,3920 3320,3920 3400,3920 5800,3920 5880,3920 5960,3920 3200,4000 3280,4000 3360,4000 5760,4000 5840,4000 5920,4000 3240,4080 3320,4080 3400,4080 5800,4080 5880,4080 5960,4080 3200,4160 3280,4160 3360,4160 5760,4160 5840,4160 5920,4160 3240,4240 3320,4240 3400,4240 5800,4240 5880,4240 5960,4240 3200,4320 3280,4320 3360,4320 3440,4320 3520,4320 3600,4320 3680,4320 3760,4320 3840,4320 3920,4320 4000,4320 4080,4320 4160,4320 4240,4320 4320,4320 4400,4320 4480,4320 4560,4320 4640,4320 4720,4320 4800,4320 4880,4320 4960,4320 5040,4320 5120,4320 5200,4320 5280,4320 5360,4320 5440,4320 5520,4320 5600,4320 5680,4320 5760,4320 5840,4320 5920,4320 3240,4400 3320,4400 3400,4400 3480,4400 3560,4400 3640,4400 3720,4400 3800,4400 3880,4400 3960,4400 4040,4400 4120,4400 4200,4400 4280,4400 4360,4400 4440,4400 4520,4400 4600,4400 4680,4400 4760,4400 4840,4400 4920,4400 5000,4400 5080,4400 5160,4400 5240,4400 5320,4400 5400,4400 5480,4400 5560,4400 5640,4400 5720,4400 5800,4400 5880,4400 5960,4400 3200,4480 3280,4480 3360,4480 3440,4480 3520,4480 3600,4480 3680,4480 3760,4480 3840,4480 3920,4480 4000,4480 4080,4480 4160,4480 4240,4480 4320,4480 4400,4480 4480,4480 4560,4480 4640,4480 4720,4480 4800,4480 4880,4480 4960,4480 5040,4480 5120,4480 5200,4480 5280,4480 5360,4480 5440,4480 5520,4480 5600,4480 5680,4480 5760,4480 5840,4480 5920,4480
  other v4: 3749.2,2935.2 3750,3075 3890,3075 3900,3320 3713.94,3373.58 5630,3405 5530,3515 4165,3735 5410,3810 5405,3870 5134.37,3922.04 5170.43,3922.28 5151.73,3941.97 4300,3950 3675,4000 3475,4005 5400,4020 3475,4045 3735,4085
GPS_ANT: IC5.13
HPSENSE: 
IMU_CS: 
In1: 
"JTAG MOD": 
"JTAG TCK": 
"JTAG TDI": 
"JTAG TDO": 
"JTAG TMS": 
"JTAG TRST": 
M-: 
MISO: H1.3 pad.5@5545,3275 | length 3111
  Top Layer 1 w10: v4(3635,3055) 3635.16,3054.84 3702.56,3054.84 H1.3
  Bottom Layer 1 w10: v4(3635,3055) 3615,3035 3615,2620 3690,2545 5410,2545 5455,2590 5455,3180 v4(5540,3265)
MOSI: H1.5 pad.5@5425,3275 | length 2938.2
  Top Layer 1 w10: v4(3635,3020) 3637.71,3020 3642.39,3015.31 H1.5
  Bottom Layer 1 w10: v4(3635,3020) 3635,2981.16 3660,2956.16 3660,2624.09 3710.59,2573.5 5388.5,2573.5 5412.95,2597.95 5412.95,2925.58 5411.5,2927.03 5411.5,3185.57 5425,3199.07 v4(5425,3270)
Motion_Inter: 
MUXSW_VOUT: 
NAND_ALE: 
NAND_CE#: 
NAND_CLE: 
NAND_I/O0: 
NAND_I/O1: 
NAND_I/O2: 
NAND_I/O3: 
NAND_I/O4: 
NAND_I/O5: 
NAND_I/O6: 
NAND_I/O7: 
NAND_R/B#: 
NAND_RE#: 
NAND_WE#: 
NAND_WP#: 
Net*1_4: 
Net*1_6: 
Net*1_8: 
Net*1_11: 
Net*1_13: 
Net*1_14: 
Net*1_19: 
Net*1_23: 
Net*1_37: 
Net*1_42: 
Net*1_44: 
Net*1_49: 
Net*1_53: 
NetANT1_1: ANT1.1 IC5.11 | length 164
  Top Layer 1 w25: ANT1.1 3600.3,4042.11 3760.81,4042.11 IC5.11
NetC11_1: 
NetC42_1: 
NetC43_1: 
NetC44_2: 
NetC45_1: 
NetC46_1: 
NetC47_2: 
NetC48_1: 
NetC100_1: 
NetC101_1: 
NetC104_1: 
NetC104_2: 
NetC107_1: 
NetC109_1: 
NetC114_2: C114.2 C116.1 C117.2 C126.1 | length 156
  Top Layer 1 w20: C126.1 4294.65,3010.35 4294.65,3054.65 4295.24,3055.24 4405.24,3055.24 C117.2
NetC115_1: C115.1 C118.1 L6.2 | length 983.5
  Top Layer 1 w25: 3940,2721.79 4170.36,2721.79 4185,2736.44 4185,3255 4200,3270 4330,3270 4345,3255 C115.1
NetC115_2: C115.2 C116.2 C119.2 | length 111.5
  Top Layer 1 w25: C116.2 C119.2 4295.35,3175.35 4344.65,3175.35 C115.2
NetC120_2: C120.2 H1.37 Y3.1 | length 302
  Top Layer 1 w11.81: C120.2 3680,3334.21 3692.68,3321.54 Y3.1 3766.69,3233.31 3789.33,3210.67 H1.37
NetC121_1: C121.1 H1.36 Y3.3 | length 529.7
  Top Layer 1 w11.81: H1.36 3809.02,3209.02 3845,3245 3973.08,3245 3980,3251.92 3980,3363.08 3963.08,3380 3935.71,3380 C121.1 3930,3375.08 3916.61,3388.46 Y3.3
NetC125_2: C125.2 C128.1 L7.2 | length 611.7
  Top Layer 1 w25: C125.2 3858.63,2755.71 3868.98,2745.36 L7.2
  Bottom Layer 1 w10: v4(3870,2730) 4285,2730 4315,2760 v4(4315,2850)
NetC127_1: C127.1 C128.2 C129.2 | length 91.9
  Top Layer 1 w20: C129.2 4314.76,2949.76 4314.76,2903.82 C128.2 4315.35,2903.94 4359.65,2903.94 C127.1
NetC131_1: C131.1 C132.1 H1.28 H1.29 H1.30 | length 198.2
  Top Layer 1 w11.81: H1.28 H1.29 H1.30 4030.47,3094.06 C132.1 C131.1
NetC134_1: C134.1 H1.22 | length 113.8
  Top Layer 1 w8.59: H1.22 3963.43,2936.57 3995,2905 C134.1
NetC135_1: C135.1 H1.25 | length 101.7
  Top Layer 1 w8.59: H1.25 4035.79,2995.63 C135.1
NetC136_2: C136.2 MD1.27 Y4.2 | length 163.6
  Top Layer 1 w12: MD1.27 5326.93,3951.81 5347.2,3972.09 Y4.2 5360,4011.5 5351.5,4020 C136.2
NetC137_2: C137.2 MD1.26 Y4.1 | length 158.7
  Top Layer 1 w12: MD1.26 5330.08,3932.13 5347.2,3915 Y4.1@5359.47,3915 ; C137.2 5350.71,3906.24 Y4.1@5359.47,3915 ; Y4.1 Y4.1@5359.47,3915
NetC156_2: 
NetC157_2: 
NetC158_2: 
NetC159_2: 
NetD1_1: 
NetD2_1: 
NetD2_2: 
NetD3_1: 
NetD3_2: 
NetD4_2: 
NetD5_2: 
NetD6_2: 
NetD7_2: 
NetECG1_2: 
NetECG1_3: 
NetIC1_7: 
NetIC1_9: 
NetIC2_2: 
NetIC2_7: 
NetIC3_12: 
NetIC3_13: 
NetIC4_1: 
NetIC4_6: 
NetIC6_F9: 
NetMD1_2: MD1.2 R37.1 | length 59.1
  Top Layer 1 w8.59: R37.1 4991.61,3991.18 MD1.2
NetQ1_2: 
NetQ4_2: 
NetR21_1: 
NetR57_1: 
NetR58_1: 
NFC_Point1: C117.1 | length 925.5
  Top Layer 1 w7.87: C117.1 4545,3055 4565,3035 4565,2890 4589.52,2865.48 v4(4636.01,2865.48)
  Top Layer 1 w9.8: v4@4635,2865 5225.55,2865
NFC_Point2: C126.2 C129.1 C130.1 | length 1227.5
  Top Layer 1 w20: C129.1 4255.59,2950.12 v4(4255.59,2980) 4255.59,3009.88 C126.2
  Bottom Layer 1 w10: v4(4090,2950) 4225.59,2950 v4(4255.59,2980) 4320.59,3045 4575,3045 4690.14,2929.86 v4(5170.35,2929.86)
NSS: H1.1 pad.5@5545,3125 | length 3057.3
  Top Layer 1 w10: v4(3635,3095) 3635.47,3094.53 3702.24,3094.53 H1.1
  Bottom Layer 1 w10: v4(3635,3095) 3600,3060 3600,2615.91 3684.41,2531.5 5415.59,2531.5 5468.5,2584.41 5468.5,3053.5 v4(5540,3125)
OPAMP+: 
Out: 
PAR: 
Point1: 
Point2: 
Power_reset: 
RECT: 
SCK: H1.7 pad.5@5425,3125 | length 2769.4
  Top Layer 1 w10: v4(3635,2955) 3635.54,2955 3656.48,2975.94 H1.7
  Bottom Layer 1 w10: v4(3635,2955) 3635,2630 3705,2560 5394.09,2560 5430,2595.91 v4(5430,3125)
SCL: IC5.17 pad.5@5430,2670 | length 2581.3
  Bottom Layer 1 w10: v4(3735,3780) 5080,3780 5385,3475 v4(5385,2670)
SCL_POWER: 
SD_VSELECT: 
SDA: IC5.16 pad.5@5550,2670 | length 2854.9
  Bottom Layer 1 w10: v4(3734.19,3822.53) 5056.56,3822.53 5299.09,3580 5550,3580 5595,3535 v4(5595,2660)
SDA_POWER: 
Shielding:  | length 2532.1
  Top Layer 1 w5: 4490,3034.83 4490,2820 5257.07,2820 ; 4490,3075.17 4490,3297.07 ; 4492.93,3300 5257.07,3300 ; 5290,2822.9 5290,3297.04
  Bottom Layer 1 w12: v2(4416.45,4609.36) 4416.45,4538.55 4430,4525
  other v2: 3428.16,2184.42 3498.16,2184.42 3568.16,2184.42 3638.16,2184.42 3708.16,2184.42 3778.16,2184.42 3848.16,2184.42 3918.16,2184.42 3988.16,2184.42 4058.16,2184.42 4128.16,2184.42 4198.16,2184.42 4268.16,2184.42 4338.16,2184.42 4408.16,2184.42 4478.16,2184.42 4548.16,2184.42 4618.16,2184.42 4688.16,2184.42 4758.16,2184.42 4828.16,2184.42 4898.16,2184.42 4968.16,2184.42 5038.16,2184.42 5108.16,2184.42 5178.16,2184.42 5248.16,2184.42 5318.16,2184.42 5388.16,2184.42 5458.16,2184.42 5528.16,2184.42 5598.16,2184.42 5668.16,2184.42 5738.16,2184.42 5808.16,2184.42 5878.16,2184.42 3224.76,2184.83 3294.76,2184.83 3364.76,2184.83 3095,2275 6005,2285 3095,2345 6005,2355 3095,2415 6005,2425 3095,2485 6005,2495 3095,2555 6005,2565 3095,2625 6005,2635 3095,2695 6005,2705 3095,2765 6005,2775 3095,2835 6005,2845 3095,2905 6005,2915 3095,2975 6005,2985 3095,3045 6005,3055 3095,3115 6005,3125 3095,3185 6005,3195 3095,3255 6005,3265 3095,3325 6005,3335 3095,3395 6005,3405 3095,3465 6005,3475 3095,3535 6005,3545 3095,3605 6005,3615 3095,3675 6005,3685 3095,3745 6005,3755 3095,3815 6005,3825 3095,3885 6005,3895 3095,3955 6005,3965 3095,4025 6005,4035 3095,4095 6005,4105 3095,4165 6005,4175 3095,4235 6005,4245 3095,4305 6005,4315 3095,4375 6005,4385 3095,4445 6005,4455 3095,4515 6005,4525 3238.16,4609.42 3308.16,4609.42 3378.16,4609.42 3436.45,4609.36 3506.45,4609.36 3576.45,4609.36 3646.45,4609.36 3716.45,4609.36 3786.45,4609.36 3856.45,4609.36 3926.45,4609.36 3996.45,4609.36 4066.45,4609.36 4136.45,4609.36 4206.45,4609.36 4276.45,4609.36 4346.45,4609.36 4486.45,4609.36 4556.45,4609.36 4626.45,4609.36 4696.45,4609.36 4766.45,4609.36 4836.45,4609.36 4906.45,4609.36 4976.45,4609.36 5046.45,4609.36 5116.45,4609.36 5186.45,4609.36 5256.45,4609.36 5326.45,4609.36 5396.45,4609.36 5466.45,4609.36 5536.45,4609.36 5606.45,4609.36 5676.45,4609.36 5743.16,4609.42 5813.16,4609.42 5883.16,4609.42
  other v3: 4529.35,2836.76 4552.97,2836.76 4576.6,2836.76 4600.22,2836.76 4623.84,2836.76 4647.46,2836.76 4671.08,2836.76 4694.71,2836.76 4718.33,2836.76 4741.95,2836.76 4765.57,2836.76 4789.19,2836.76 4812.82,2836.76 4836.44,2836.76 4860.06,2836.76 4883.68,2836.76 4907.3,2836.76 4930.93,2836.76 4954.55,2836.76 4978.17,2836.76 5001.79,2836.76 5025.41,2836.76 5049.04,2836.76 5072.66,2836.76 5096.28,2836.76 5119.9,2836.76 5143.52,2836.76 5167.15,2836.76 5190.77,2836.76 5214.39,2836.76 5238.01,2836.76 5260.87,2838.7 4506.76,2843.64 5273.24,2856.41 4506.76,2867.26 5273.24,2880.04 4506.76,2890.88 5273.24,2903.66 4506.76,2914.51 5273.24,2927.28 4506.76,2938.13 5273.24,2950.9 4506.76,2961.75 5273.24,2974.52 4506.76,2985.37 5273.24,2998.15 4506.76,3008.99 5273.24,3021.77 5273.24,3045.39 5273.24,3069.01 5273.24,3092.63 4506.76,3098.03 5273.24,3116.26 4506.76,3121.65 5273.24,3139.88 4506.76,3145.27 5273.24,3163.5 4506.76,3168.9 5273.24,3187.12 4506.76,3192.52 5273.24,3210.74 4506.76,3216.14 5273.24,3234.37 4506.76,3239.76 5273.24,3257.99 4506.76,3263.38 5273.06,3278.61 4519.55,3283.24 4543.17,3283.24 4566.79,3283.24 4590.41,3283.24 4614.03,3283.24 4637.66,3283.24 4661.28,3283.24 4684.9,3283.24 4708.52,3283.24 4732.14,3283.24 4755.77,3283.24 4779.39,3283.24 4803.01,3283.24 4826.63,3283.24 4850.25,3283.24 4873.88,3283.24 4897.5,3283.24 4921.12,3283.24 4944.74,3283.24 4968.36,3283.24 4991.99,3283.24 5015.61,3283.24 5039.23,3283.24 5062.85,3283.24 5086.47,3283.24 5110.1,3283.24 5133.72,3283.24 5157.34,3283.24 5180.96,3283.24 5204.58,3283.24 5228.21,3283.24 5251.83,3283.24
SS0: 
TX1: H1.21 L6.1 | length 127.6
  Top Layer 1 w12: H1.21 3939.91,2916.89 3940,2916.8 L6.1
TX2: H1.18 L7.1 | length 98.2
  Top Layer 1 w6: H1.18 3870,2887.4 3870,2840
  Top Layer 1 w7.87: L7.1@3868.07,2796.57 L7.1
  Top Layer 1 w11.81: L7.1 3870,2840
USB_OTG1_3P3_IN: 
Vbatt: 
Vib: 
VMID: C118.2 C119.1 C125.1 C127.2 H1.17 | length 1722.6
  Top Layer 1 w6: C125.1 3821.17,2805.46 3821.17,2821.17 3848.39,2848.39 H1.17
  Top Layer 1 w25: C125.1 3809.29,2795 3765,2795 3740,2770 3740,2674.64 3754.64,2660 C118.2 4219.29,2660 ; C119.1 4233.94,3214.29 4219.29,3199.65 4219.29,2660 ; C127.2 4360,2690 4330,2660 4219.29,2660
VRI: 
pads on no net: H1.2 H1.8 H1.11 H1.14 H1.15 H1.16 H1.20 H1.31 H1.32 H1.33 H1.34 H1.35 H1.38 H1.39 H1.40 IC5.2 IC5.3 IC5.4 IC5.5 IC5.14 IC5.15 IC5.18 MD1.1 MD1.6 MD1.7 MD1.8 MD1.9 MD1.10 MD1.11 MD1.12 MD1.13 MD1.14 MD1.15 MD1.16 MD1.21 MD1.24 MD1.25 MD1.28 MD1.29 MD1.30 MD1.31 MD1.32 MD1.33 MD1.34 MD1.37 MD1.38 MD1.39
copper on no net: | length 3628.7
  Top Layer 1 w5: 4490,3297.07 4492.93,3300 ; 5257.07,2820 5260,2822.93 ; 5257.07,3300 5260,3297.07
  Top Layer 1 w9.8: 5167.47,2929.35 4802.58,2929.35 4802.47,2929.24 4671.68,2929.24 4665.94,2934.98 4665.94,2960.55 4665.94,3188.76 4666.4,3189.22 4666.4,3224.26 4672.14,3230 4972.96,3230 5189.17,3230 5194.91,3224.26 5194.91,2939.91 5195,2939.83 5195,2902.52 5189.26,2896.78 4695,2896.78 4640.74,2896.78 4635,2902.52 4635,2915 4635,3260 5224.25,3260 5225.55,3258.7 5225.55,2865 ; 5225,3130 5225.55,3129.45
  Bottom Layer 1 w25: 4485,2210 4545,2210

## Polygon pours and split planes (outlines as drawn)
+VS on Top Layer 1 "NONET_L01_P-001" (hatched 45Degree grid 15 track 10, pour order 53): 3427.18,2480 5720,2480 5720,4260 3427.18,4260
GND on Top Layer 1 "NONET_L01_P-001" (solid, pour order 49): 3095,2185 6005,2185 6005,4610 3095,4610
no net on Top Layer 1 "NONET_L01_P-001" (solid, pour order 54): 4490,3295 5255,3295 5260,3300 5260,2820 4490,2820
GND on Bottom Layer 1 "NONET_L01_P-001" (solid, pour order 51): 3095,2185 6005,2185 6005,4610 3095,4610

## Other copper
Top Layer 1:
  pour cut-out: 4491.55,3041.27 4493.46,3040.48 4495.65,3038.29 4496.44,3036.37 4496.44,3035.57 4496.75,3034.83 4496.75,2826.75 5257.07,2826.75 5257.81,2826.44 5258.62,2826.44 5260.53,2825.65 5262.72,2823.46 5263.51,2821.55 5263.51,2820 5263.51,2818.45 5262.72,2816.54 5260.53,2814.35 5258.62,2813.56 5257.81,2813.56 5257.07,2813.25 4490,2813.25 4489.26,2813.56 4488.45,2813.56 4486.54,2814.35 4484.35,2816.54 4483.56,2818.45 4483.56,2819.26 4483.25,2820 4483.25,3034.83 4483.56,3035.57 4483.56,3036.37 4484.35,3038.29 4486.54,3040.48 4488.45,3041.27 4490,3041.27 4491.55,3041.27
  pour cut-out: 5291.55,3303.49 5293.46,3302.69 5295.65,3300.5 5296.44,3298.59 5296.44,3297.79 5296.75,3297.04 5296.75,2822.9 5296.44,2822.16 5296.44,2821.35 5295.65,2819.44 5293.46,2817.25 5291.55,2816.46 5290,2816.46 5288.45,2816.46 5286.54,2817.25 5284.35,2819.44 5283.56,2821.35 5283.56,2822.16 5283.25,2822.9 5283.25,3297.04 5283.56,3297.79 5283.56,3298.59 5284.35,3300.5 5286.54,3302.69 5288.45,3303.49 5290,3303.49 5291.55,3303.49
  pour cut-out: 5257.81,3306.44 5258.62,3306.44 5260.53,3305.65 5262.72,3303.46 5263.51,3301.55 5263.51,3300 5263.51,3298.45 5262.72,3296.54 5260.53,3294.35 5258.62,3293.56 5257.81,3293.56 5257.07,3293.25 4496.75,3293.25 4496.75,3075.17 4496.44,3074.43 4496.44,3073.63 4495.65,3071.71 4493.46,3069.52 4491.55,3068.73 4490,3068.73 4488.45,3068.73 4486.54,3069.52 4484.35,3071.71 4483.56,3073.63 4483.56,3074.43 4483.25,3075.17 4483.25,3297.07 4483.56,3297.81 4483.56,3298.62 4484.35,3300.53 4486.54,3302.72 4487.06,3302.94 4487.28,3303.46 4489.47,3305.65 4491.38,3306.44 4492.19,3306.44 4492.93,3306.75 5257.07,3306.75
  pour cut-out: 4493.12,3297.5 4493.12,3287.5 4493.12,2817.5 5263.12,2817.5 5263.12,3297.5
Multi-Layer:
  lines w50: 3095,2185 6005,2185 6005,4610 3095,4610 3095,2185

## Silkscreen, mask and mechanical layers (free items; w line width, h text height)
Top Overlay:
  lines w10: 4480,3575 4535,3575 ; 3425,3575 4490,3575 ; 3425,3575 3425,4260 4490,4260 ; 3425,3575 3425,2480 4490,2480 ; 4490,2480 5720,2480 5730,2490 5730,3575 ; 4490,2480 4490,2820 5290,2820 5290,3300 4490,3300 4490,3575 ; 4490,3575 5730,3575 ; 4490,3575 4490,4260 ; 4490,3575 4490,4260 ; 4490,4260 5730,4260 5730,3575
  text "GPS" at 3450,3595 h60
  text "Bluetooth" at 4510,3595 h60
  text "+" at 5255,3435 h60
  text "-" at 5670,3435.01 h60
  text "Mosi" at 5390,3330 h20
  text "Miso" at 5510,3330 h20
  text "SCK" at 5395,3180 h20
  text "NSS" at 5515,3180 h20
  text "BLE RX" at 5355,3035 h20
  text "BLE TX" at 5500,3035 h20
  text "BLE CTS" at 5335,2885 h20
  text "BLE RTX" at 5500,2885 h20
  text "SCL" at 5395,2725 h20
  text "SDA" at 5515,2725 h20
  text "Connections" at 4520,2505 h60
  text "NFC" at 3455,2500 h60
Top Solder:
  lines w50: 3095,2185 6005,2185 6005,4610 3095,4610 3095,2185
Bottom Solder:
  lines w50: 3095,2185 6005,2185 6005,4610 3095,4610 3095,2185
Mechanical 1:
  lines w19.68: 3060.16,2265.45 ccw(c3170.45,2265.45) 3170.45,2155.16 5929.55,2155.16 ccw(c5929.55,2265.45) 6039.84,2265.45 6039.84,4523.5 ccw(c5918.5,4523.5) 5918.5,4644.84 3176.92,4644.84 ccw(c3176.92,4528.08) 3060.16,4528.08 3060.16,2265.45